# Altium PCB PCB1.PcbDoc
Units mil, origin at the board's own origin, x right, y up, seen from the top; angles counter-clockwise.
Board outline 2000 x 2000 mil, 2 copper layers (Top Layer, Bottom Layer), stack 62.8 mil thick; 13 components, 6 nets, 41 pads, 14 vias.
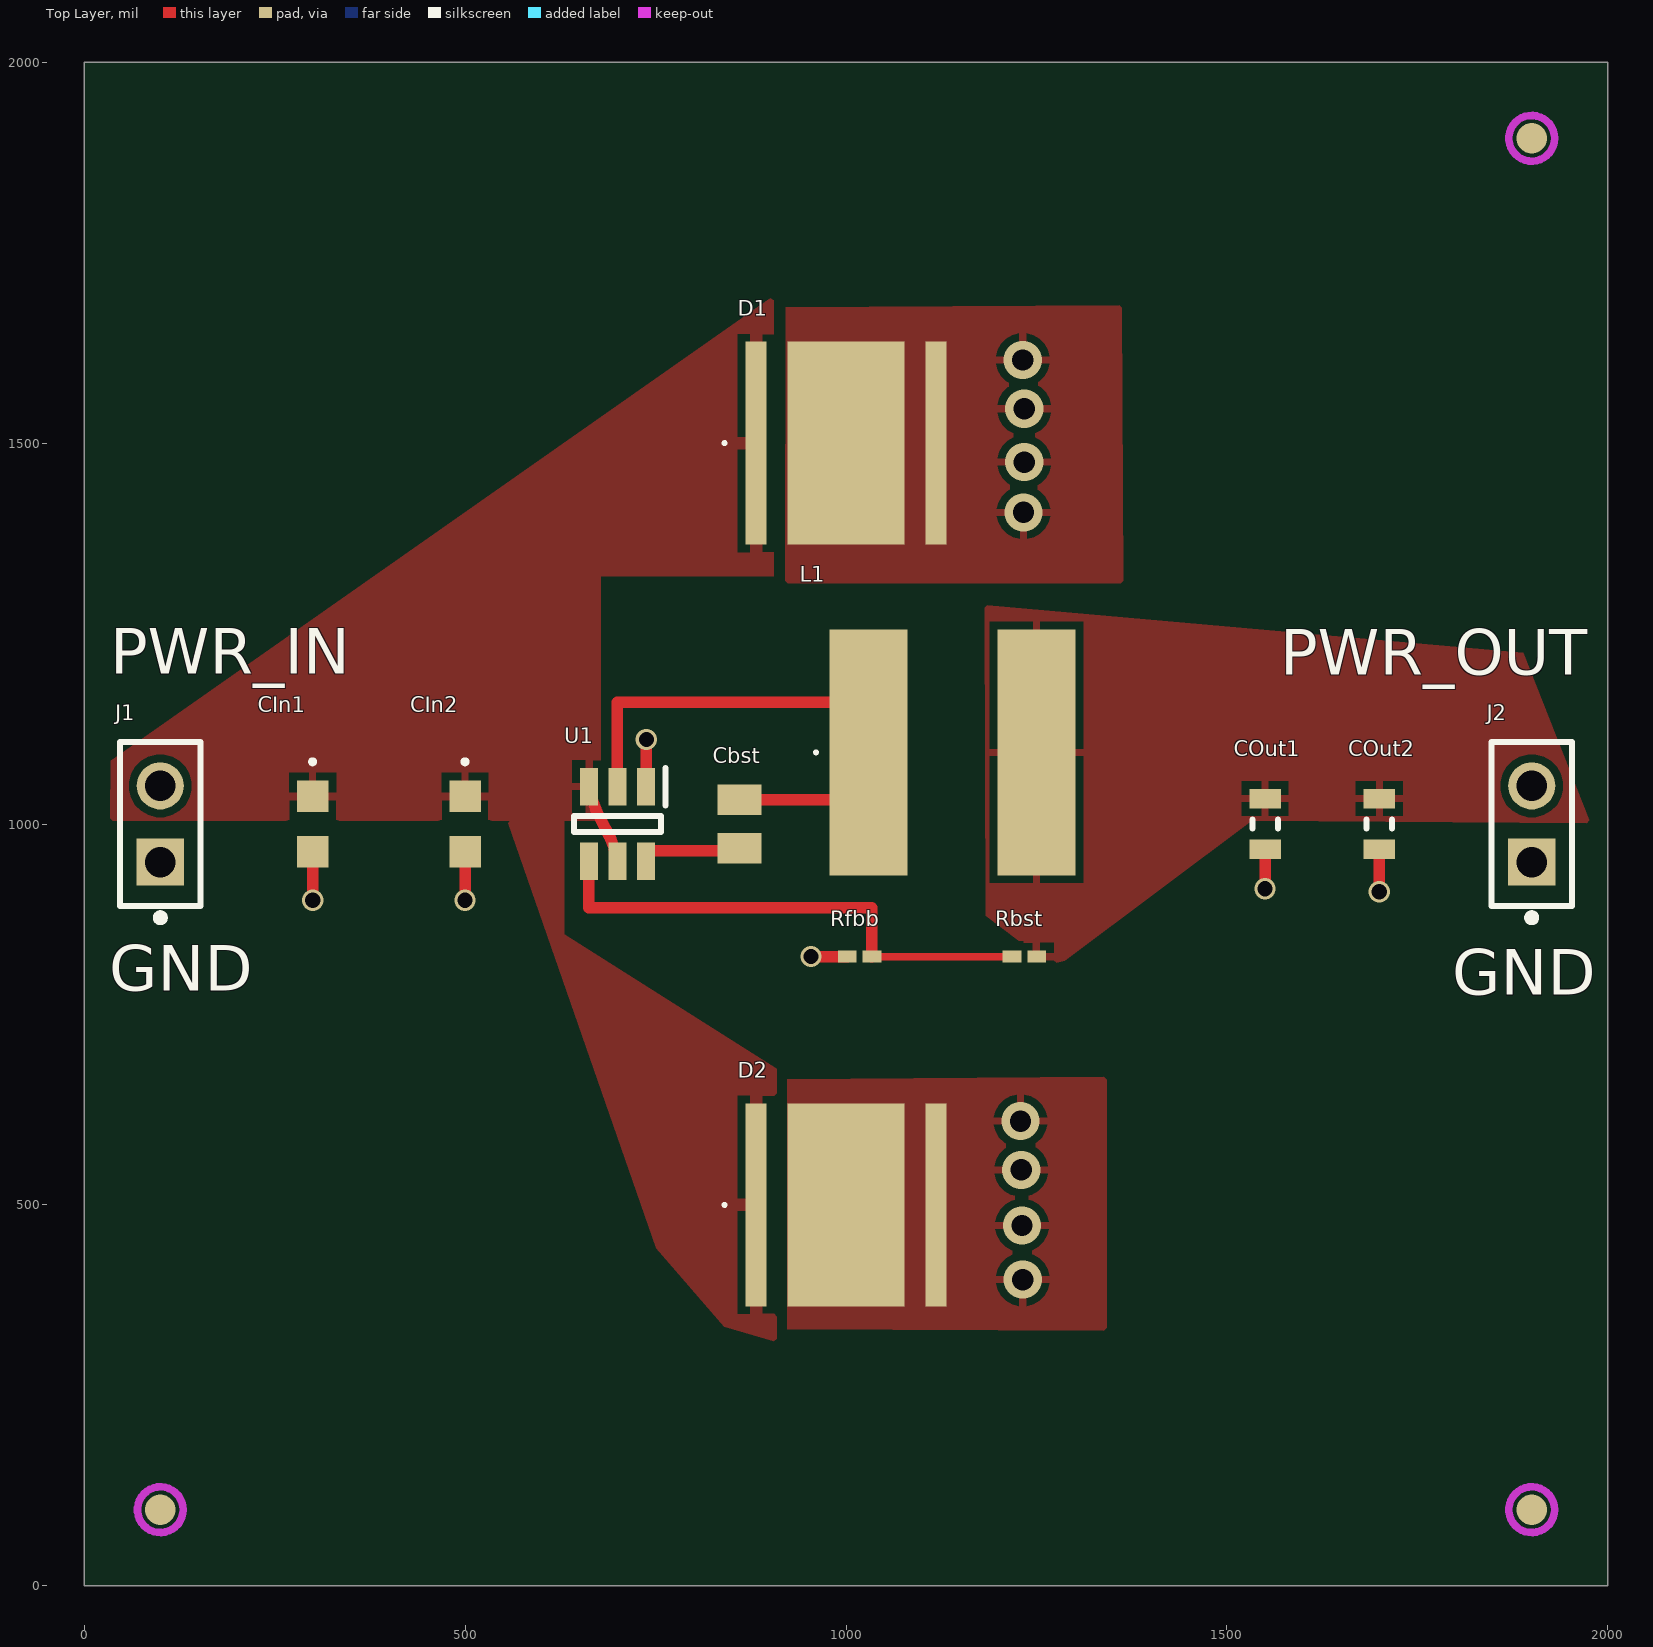
[diagram p0: Top Layer view]
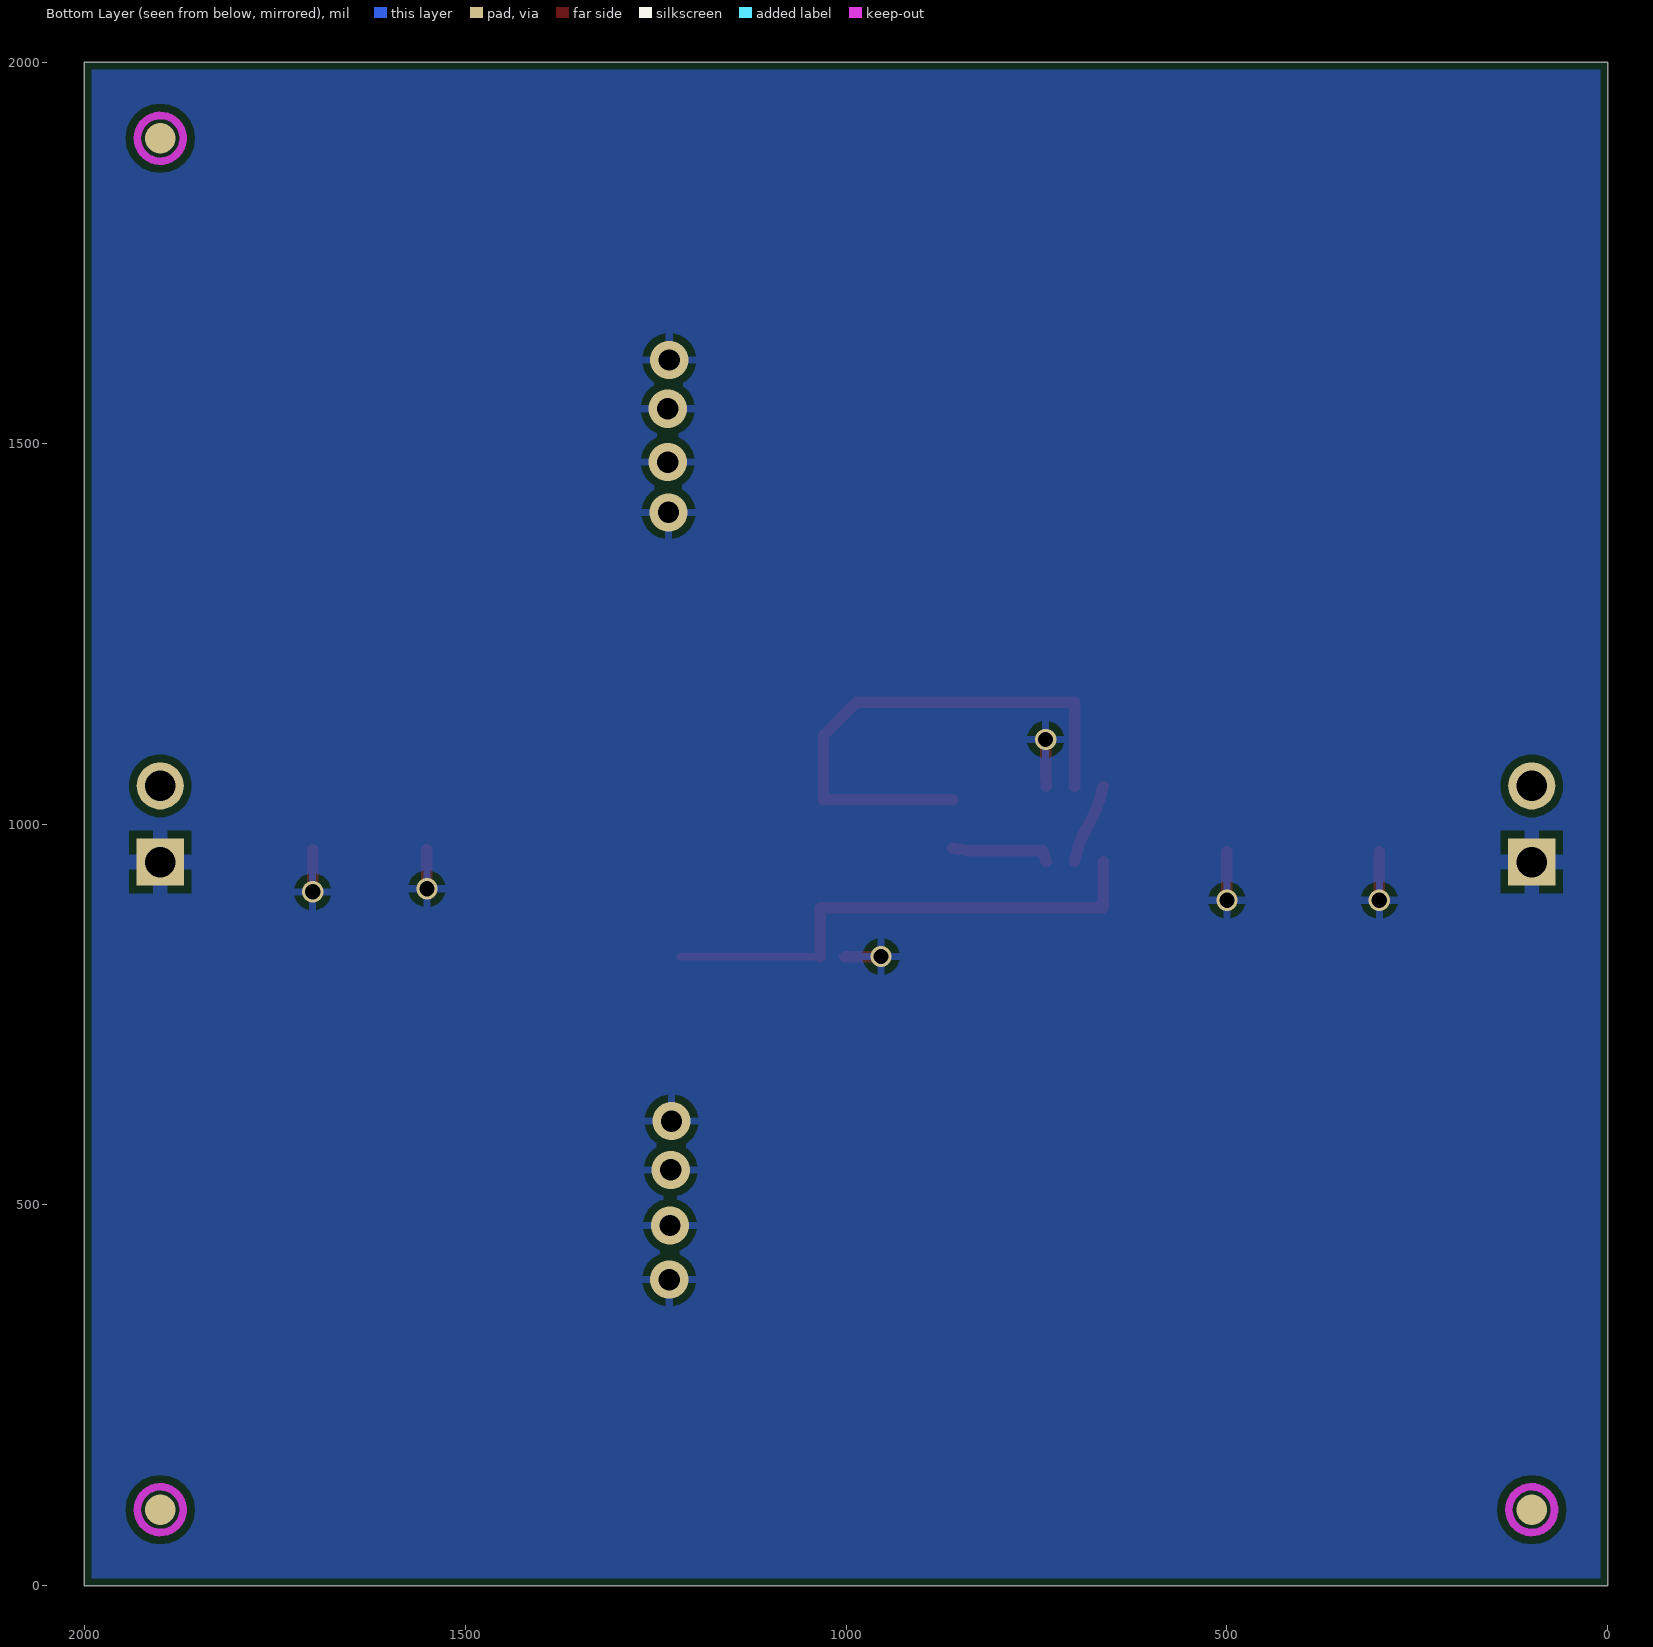
[diagram p1: Bottom Layer view, seen from below]
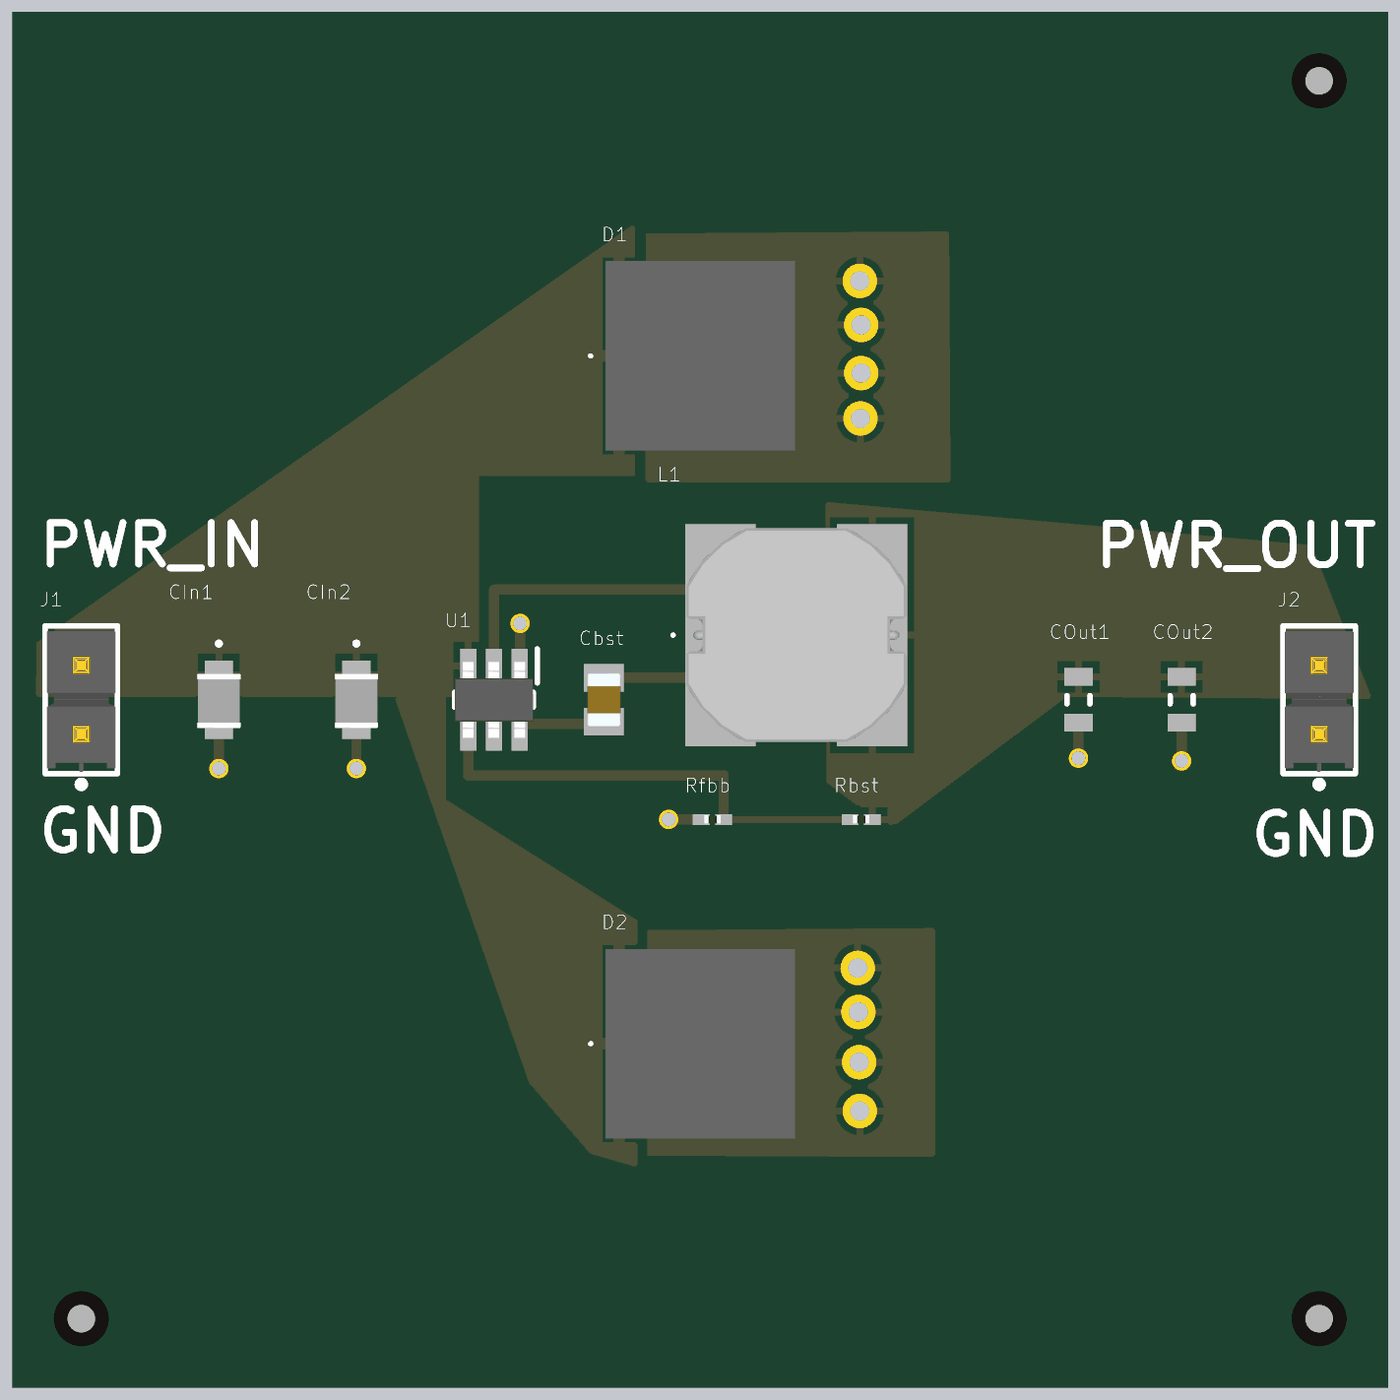
[diagram p2: 3D render of the assembled board from above, using the file's embedded part models]

## Layer stack, top to bottom
Top Solder: solder mask 0.4, Solder Resist, Dk 3.5
Top Layer: signal copper 1.4
Dielectric 1: dielectric 60, FR-4, Dk 4.8
Bottom Layer: signal copper 1.4
Bottom Solder: solder mask 0.4, Solder Resist, Dk 3.5

## Board outline
0,0 2000,0 2000,2000 0,2000

## Design rules (kind name [scope] priority, off if disabled: settings)
BoardOutlineClearance [All] p1: gap=10 ignorepadtopadclearanceinfootprint=FALSE
Clearance [All] p1: gap=10 ignorepadtopadclearanceinfootprint=TRUE except(0: Arc-Hole Track-Hole SMDPad-Hole THPad-Hole Via-Hole Fill-Hole Poly-Hole Region-Hole Text-Hole)
MinimumSolderMaskSliver [All] p1: minsoldermaskwidth=5
PolygonConnect [All] p1: connectstyle=Relief reliefconductorwidth=10 reliefentries=4 polygonreliefangle="90 Angle" airgapwidth=10
RoutingVias [All] p1: holewidth=10 width=18 viastyle="Through Hole" minholewidth=6 minwidth=14 maxholewidth=28 maxwidth=50
SilkToSolderMaskClearance [IsPad] p1: minsilkscreentomaskgap=8 clearancetoexposedcopper=TRUE
SolderMaskExpansion [All] p1: expansion=0 istentingtop=FALSE
Width [All] p1: maxlimit=30 minlimit=5 preferedwidth=10
28 further rules are at their usual default settings.

## Components (designator, comment, footprint, x,y, rotation, side; value= is the part's Value field where it differs from the comment)
Cbst "08053C104KAT2A" CAPC2012X94N 860,1000 r90 top
CIn1 "C2012X5R1V106K085AC" C2012_Commercial 300,1000 r270 top
CIn2 "C2012X5R1V106K085AC" C2012_Commercial 500,1000 r270 top
COut1 "C1608X5R1A226M080AC" CAPC1608X100X20ML10 1550,1000 r90 top
COut2 "C1608X5R1A226M080AC" CAPC1608X100X20ML10 1700,1000 r90 top
D1 "MKRAWT-02-0000-0D0HG227H" MKRAWT0200000D0HG227H 1000,1500 r0 top
D2 "MKRAWT-02-0000-0D0HG227H" MKRAWT0200000D0HG227H 1000,500 r0 top
J1 "TSW-102-07-L-S" FP-TSW-102-07-L-S-MFG 100,1000 r90 top
J2 "TSW-102-07-L-S" FP-TSW-102-07-L-S-MFG 1900,1000 r90 top
L1 "SRN8040-4R7Y" SRN80404R7Y 1139.76,1094 r0 top
Rbst "RC0201FR-0756K2L" RESC0603X26N 1234,826 r0 top
Rfbb "RC0201FR-0710KL" RESC0603X26N 1017.78,826 r0 top
U1 "TPS562200DDCR" SOT95P280X110-6N 700,1000 r270 top

## Footprints (in the part's own frame and the unit in brackets; to place one, negate y for a bottom-side part, rotate by r counter-clockwise, add the part's x,y. Pads: shape width x height; smd on the part's side, far side on the other; paste and mask are expansions set on the pad)
C2012_Commercial [mm]
  rect 1.05x1.05 smd: 1(-0.925,0) 2(0.925,0)
  silkscreen extent -2.12,-0.05 -2.03,0.05, body extent -0.96,-0.8 1.04,0.8, height 1.25
CAPC1608X100X20ML10 [mm] "Chip Capacitor, 2-Leads, Body 1.70x0.90mm, IPC Low Density"
  rect 0.65x1.05 smd: 1(-0.85,0) 2(0.85,0)
  silkscreen extent -0.15,-0.43 0.15,0.43, body extent -0.85,-0.45 0.85,0.45, height 1
CAPC2012X94N [mm]
  rect 1.02x1.47 smd: 1(-0.81,0) 2(0.81,0)
  body extent -1,-0.63 1,0.63, height 0.94
FP-TSW-102-07-L-S-MFG [mm]
  rect 1.57x1.57 hole 1.02 paste-2539.97 mask+0: 1(-1.27,0)
  round 1.57 hole 1.02 paste-2539.97 mask+0: 2(1.27,0)
  silkscreen extent -3.25,-1.34 2.73,1.34, body extent -2.83,-1.44 2.83,1.44, height 0.25
MKRAWT0200000D0HG227H [mm]
  rect 0.7x6.76 smd: 1(-3,0) 2(3,0)
  rect 3.9x6.76 smd: 3(0,0)
  silkscreen extent -4.1,-0.05 -4,0.05, body extent -3.5,-3.5 3.5,3.5, height 4.31
RESC0603X26N [mm]
  rect 0.625x0.4 smd: 1(-0.412,0) 2(0.412,0)
  body extent -0.3,-0.15 0.3,0.15, height 0.26
SOT95P280X110-6N [mm]
  rect 1.25x0.6 smd: 1(-1.25,0.95) 2(-1.25,0) 3(-1.25,-0.95) 4(1.25,-0.95) 5(1.25,0) 6(1.25,0.95)
  silkscreen extent -1.88,-1.45 0.28,1.6, body extent -1.4,-1.45 1.4,1.45, height 0.97
SRN80404R7Y [mm]
  rect 2.6x8.2 smd: 1(-2.8,0) 2(2.8,0)
  silkscreen extent -4.6,-0.05 -4.5,0.05, body extent -4.08,-3.95 4.08,3.95, height 3.95

## Part data
Cbst: "Capacitor", Manufacturer_Name=AVX, Mouser Part Number=581-08053C104K, Arrow Part Number=08053C104KAT2A, Arrow Price/Stock=https://www.arrow.com/en/products/08053c104kat2a/avx, Datasheet Link=http://datasheets.avx.com/X7RDielectric.pdf, Height=0.94mm, Manufacturer_Part_Number=08053C104KAT2A, Mouser Price/Stock=https://www.mouser.co.uk/ProductDetail/AVX/08053C104KAT2A?qs=EihRZLdKnF2GcTBzDkE%2FiQ%3D%3D
CIn1 CIn2: "Capacitor", Manufacturer_Name=TDK, Mouser Part Number=810-C2012X5R1V106K0C, Arrow Part Number=C2012X5R1V106K085AC, Arrow Price/Stock=https://www.arrow.com/en/products/c2012x5r1v106k085ac/tdk?region=nac, Datasheet Link=https://product.tdk.com/system/files/dam/doc/product/capacitor/ceramic/mlcc/catalog/mlcc_commercial_general_en.pdf, Height=0.75mm, Manufacturer_Part_Number=C2012X5R1V106K085AC, Mouser Price/Stock=https://www.mouser.co.uk/ProductDetail/TDK/C2012X5R1V106K085AC?qs=6JAMGB%252BEdky%252BlYMcTLhFyA%3D%3D
COut1 COut2: library part CMP-2000-05441-1, "Chip Capacitor, 22 uF, +/- 20%, 10 V, -55 to 85 degC, 0603 (1608 Metric), RoHS, Tape and Reel", Capacitance=22µF, Manufacturer=TDK, Operating Temperature=-55degC~85degC, Package / Case=0603(1608Metric), Package Description="2-Pin Surface Mount Device, Body 1.6 x 0.8 mm", Package Reference=603, PCN Part Number=MLCCPartNumberChange30/Nov/2012, Ratings=-, Standard Package=1, Temperature Coefficient=X5R, Tolerance=±20%, Voltage - Rated=10V, Applications=GeneralPurpose, Category=Capacitors, Datasheet URL=http://download.siliconexpert.com/pdfs/2015/4/21/15/54/45/779/tdk_/manual/37024850441143360mlcc_commercial_general_en.pdf, Datasheet Version=Mar-15, Design Resources=20WNon-IsolatedBuckLEDDriverUsingPLLNK460KG, Family=CeramicCapacitors, Features=-, Height - Seated (Max)=-, Kits=445-9014-KIT-ND-KITMLCC100PF-22UF060310-50V, Lead Spacing=-, Lead Style=-, Manufacturer URL=http://www.tdk.com/, Mounting Type=SurfaceMount,MLCC, Online Catalog=CSeries,GeneralPurpose, Other Names=445-9077-1, Packaging=CutTape(CT), Product Training Modules=CSeriesGeneralApplicationsSEAT,CCV,andTVCLDesignToolsGuidetoReplacinganElectrolyticCapacitorwithanMLCC, RoHS Information=RoHSCertificate-MLCC, Series=C, Size / Dimension="0.063\"Lx0.031\"W(1.60mmx0.80mm)", Thickness (Max)="0.035\"(0.90mm)"
D1 D2: "LED", Manufacturer_Name="CREE LED", Mouser Part Number=941-MKRAWT20D0HG227H, Datasheet Link=https://assets.cree-led.com/a/ds/x/XLamp-MKR.pdf, Height=4.21mm, Manufacturer_Part_Number=MKRAWT-02-0000-0D0HG227H, Mouser Price/Stock=https://www.mouser.co.uk/ProductDetail/Cree-LED/MKRAWT-02-0000-0D0HG227H?qs=sVgt%2FnWVh7apRdKowZa3kg%3D%3D
J1 J2: library part CMP-02766-001428-1, "CONN HEADER VERT 2POS 2.54MM", Color=Black, Current Rating=7.6A, Max Operating Temperature=125°C, Max Voltage Rating (AC)=550V, Min Operating Temperature=-55°C, Package Quantity=1, Connector Type="Male Pin", Contact Material=Bronze, Contact Mating Length=0.23inch, Contact Plating=Gold, Contact Type="Male Pin", Depth=2.54mm, Gender=Male, Housing Color=Black, Housing Material=Polyester, Lead Free="Lead Free", Length=5.08mm, Max Current Rating=7.6A, Mount="Through Hole", Number of Contacts=2, Number of Positions=2, Number of Rows=1, Orientation=Straight, Packaging=Bulk, Pitch=2.54mm, Radiation Hardening=No, REACH SVHC="No SVHC", RoHS Compliant=Yes, Series=TSW, Termination=Solder, Voltage Rating=550V, Width=2.54mm
L1: "Inductor", Manufacturer_Name=Bourns, Mouser Part Number=652-SRN8040-4R7Y, Arrow Part Number=SRN8040-4R7Y, Arrow Price/Stock=https://www.arrow.com/en/products/srn8040-4r7y/bourns?region=nac, Datasheet Link=https://www.bourns.com/docs/Product-Datasheets/SRN8040.pdf, Height=4mm, Manufacturer_Part_Number=SRN8040-4R7Y, Mouser Price/Stock=https://www.mouser.co.uk/ProductDetail/Bourns/SRN8040-4R7Y?qs=opBjA1TV900PE0RcT6q7Gw%3D%3D
Rbst: "Resistor", Manufacturer_Name=KEMET, Mouser Part Number=603-RC0201FR-0756K2L, Arrow Part Number=RC0201FR-0756K2L, Arrow Price/Stock=https://www.arrow.com/en/products/rc0201fr-0756k2l/yageo?region=nac, Datasheet Link=http://www.yageo.com/documents/recent/PYu-RC0201_51_RoHS_L_8.pdf, Height=0.26mm, Manufacturer_Part_Number=RC0201FR-0756K2L, Mouser Price/Stock=https://www.mouser.co.uk/ProductDetail/YAGEO/RC0201FR-0756K2L?qs=Q4gDqC5t5%2FD3%2Fkjmz2Nr%2Fw%3D%3D
Rfbb: "Resistor", Manufacturer_Name=YAGEO, Mouser Part Number=603-RC0201FR-0710KL, Arrow Part Number=RC0201FR-0710KL, Arrow Price/Stock=https://www.arrow.com/en/products/rc0201fr-0710kl/yageo?region=europe, Datasheet Link=https://www.yageo.com/upload/media/product/productsearch/datasheet/rchip/PYu-RC_Group_51_RoHS_L_12.pdf, Height=0.26mm, Manufacturer_Part_Number=RC0201FR-0710KL, Mouser Price/Stock=https://www.mouser.co.uk/ProductDetail/YAGEO/RC0201FR-0710KL?qs=FLc6udek5PS1AiJCgpc6bQ%3D%3D
U1: "Undefined or Miscellaneous", Manufacturer_Name="Texas Instruments", Mouser Part Number=595-TPS562200DDCR, Arrow Part Number=TPS562200DDCR, Arrow Price/Stock=https://www.arrow.com/en/products/tps562200ddcr/texas-instruments?region=nac, Datasheet Link=http://www.ti.com/lit/gpn/tps562200, Height=1.1mm, Manufacturer_Part_Number=TPS562200DDCR, Mouser Price/Stock=https://www.mouser.co.uk/ProductDetail/Texas-Instruments/TPS562200DDCR?qs=7wMBv%2Ftbz9Jdis0htpD4wA%3D%3D

## Free pads (board coordinates)
  round 40 smd mask+20: 4(100,100) 4(100,100) 4(1900,100) 4(1900,100) 4(1900,1900)
  round 40 smd far side mask+20: 4(100,100) 4(100,100) 4(1900,100) 4(1900,1900)

## Via types
v1: diameter 50, hole 28, Top Layer to Bottom Layer, 8 vias
v2: diameter 28, hole 20, Top Layer to Bottom Layer, 6 vias

## Nets (pads, with @x,y where several pads share a name; then routed paths per layer and width w, separated by ;. In a path a pad name is that pad's centre, name@x,y a point inside that pad or via, vN(x,y) a via of type N, cw(c..) or ccw(c..) an arc to the next point about the centre after c; other vN are vias at no path point)
+5: COut1.2 COut2.2 L1.2 Rbst.2
+12: CIn1.1 CIn2.1 D1.1 D2.1 U1.3 U1.5 | length 105.8
  Top Layer w15: U1.3 666.91,1032.11 671.72,1018.7 ccw(c688.19,1024.61) 672.69,1016.47 689.9,983.53 cw(c674.41,975.39) 690.88,981.3 695.69,967.89 U1.5
GND: CIn1.2 CIn2.2 COut1.1 COut2.1 D1.2 D1.3 D2.2 D2.3 J1.1 J2.1 Rfbb.1 U1.1 | length 343.6
  Top Layer w15: v2(300,900) CIn1.2 ; v2(500,900) CIn2.2 ; U1.1 738,1066.32 v2(738,1111) ; v2(954,826) Rfbb.1 ; v2(1550,915) COut1.1 ; v2(1700,911) COut2.1
  other v1: 1232,402 1231,473 1230,546 1229,610 1233,1409 1234,1475 1234,1545 1232,1609
NetCbst_1: Cbst.1 U1.6 | length 133.4
  Top Layer w15: U1.6 741.71,965.08 838.56,965.08 Cbst.1
NetRbst_1: Rbst.1 Rfbb.2 U1.4 | length 680
  Top Layer w10: Rfbb.2 Rbst.1
  Top Layer w15: U1.4 662.6,890 1034,890 Rfbb.2
SW_OUT: Cbst.2 L1.1 U1.2 | length 712.4
  Top Layer w15: U1.2 700,1160 985.85,1160 1029.53,1116.32 L1.1 1029.53,1031.89 Cbst.2
pads on no net: J1.2 J2.2

## Polygon pours and split planes (outlines as drawn)
+12 on Top Layer "+12_L01_P016" (solid, pour order 16): 555,1005 751,443 840,340 909,320 909,679 630,855 630,1004
+12 on Top Layer "+12_L01_P015" (solid, pour order 15): 34,1004 678,1004 678,1325 905,1325 905,1693 35,1083
+5 on Top Layer "+5_L01_P017" (solid, pour order 17): 1181.96,1287.64 1183.53,879.81 1227,847 1233,846 1236.88,808.74 1287.16,820.35 1532.76,1004.16 1977,1001 1889.08,1224.98
GND on Top Layer "GND_L01_P014" (solid, pour order 14): 921,1678 920,1316 1364,1316 1362,1681
GND on Top Layer "GND_L01_P011" (solid, pour order 11): 923,665 923,337 1342,335 1342,668
GND on Bottom Layer "GND_L02_P001" (solid, pour order 1): 0,2000 2000,2000 2000,0 0,0

## Keep-outs
Top Layer:
  circle w10: c100,100 r30
  circle w10: c100,100 r30
  circle w10: c1900,100 r30
  circle w10: c1900,100 r30
  circle w10: c1900,1900 r30
  circle w10: c100,100 r30
Bottom Layer:
  circle w10: c100,100 r30
  circle w10: c1900,1900 r30
  circle w10: c1900,100 r30
  circle w10: c100,100 r30
  circle w10: c100,100 r30

## Silkscreen, mask and mechanical layers (free items; w line width, h text height)
Top Overlay:
  text "PWR_IN" at 34,1197 h60
  text "PWR_OUT" at 1570,1196 h60
  text "GND" at 33,781 h60
  text "GND" at 1796,776 h60